# Altium PCB PCB1.PcbDoc
Units mm, origin at the board's own origin, x right, y up, seen from the top; angles counter-clockwise.
Board outline 113.41 x 33.78 mm, 2 copper layers (Top Layer, Bottom Layer); 48 components, 34 nets, 178 pads, 58 vias.
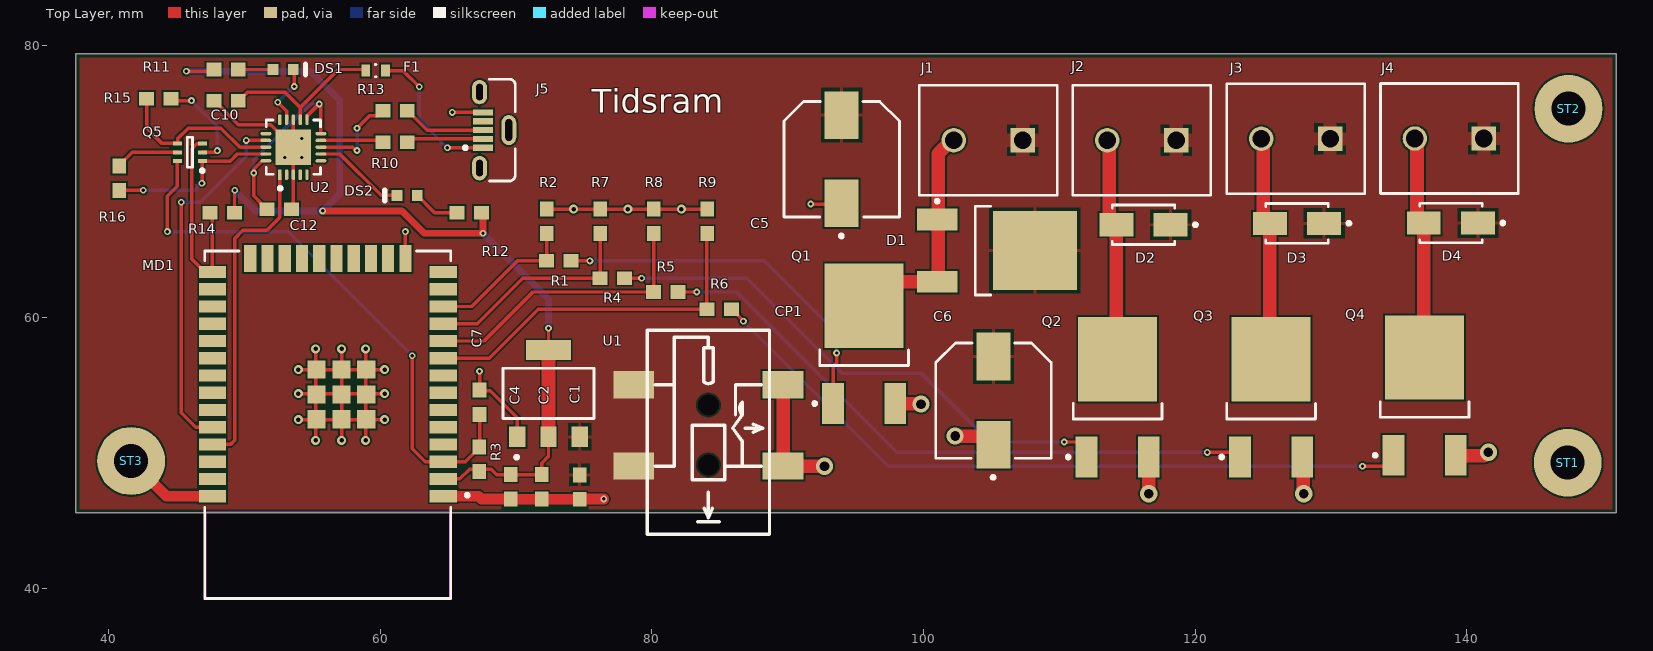
[diagram p0: Top Layer view]
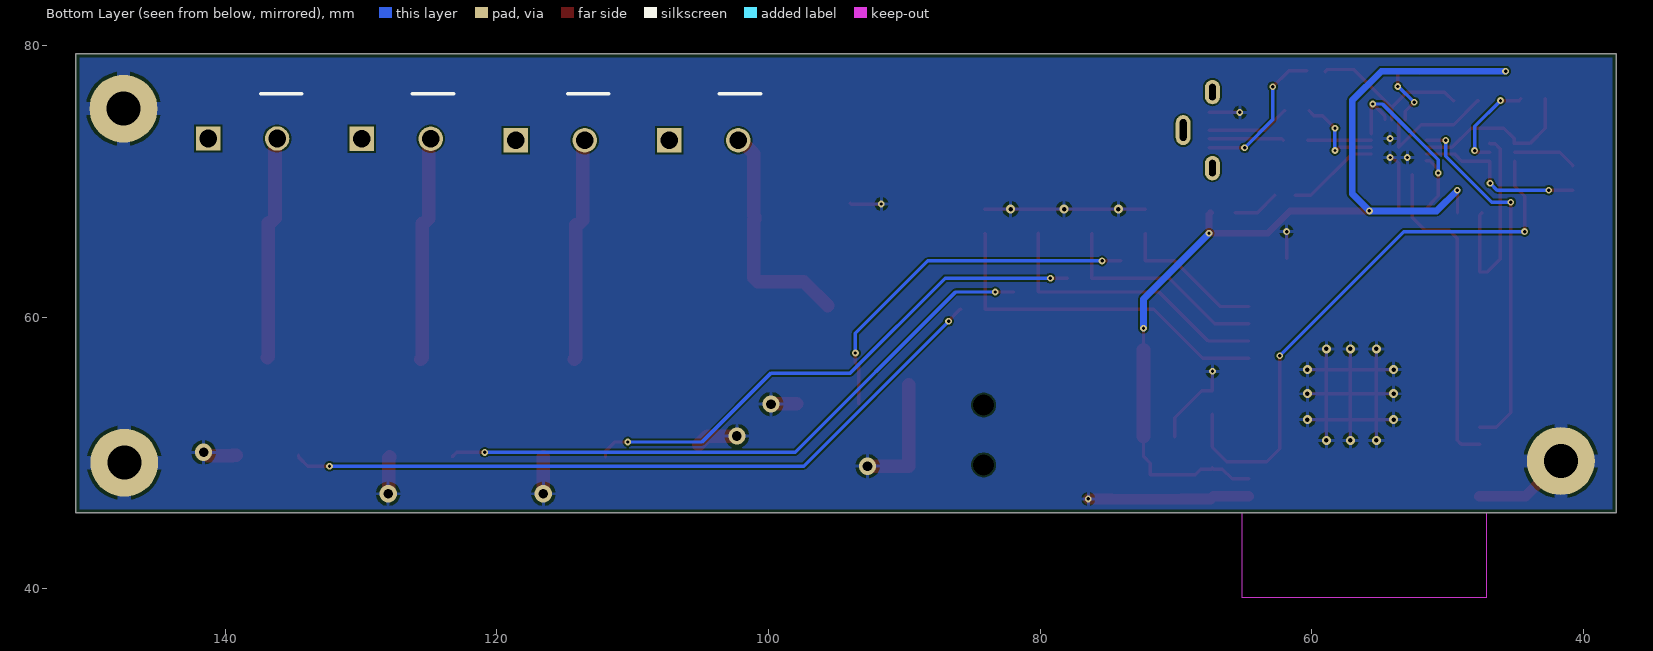
[diagram p1: Bottom Layer view, seen from below]
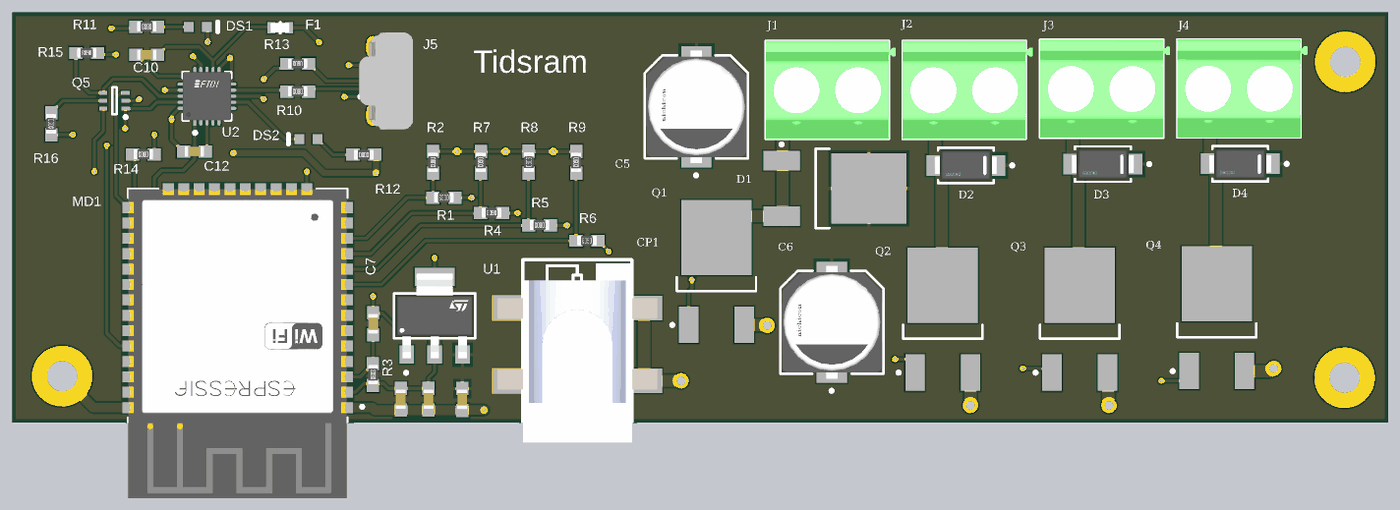
[diagram p2: 3D render of the assembled board from above, using the file's embedded part models]

## Layer stack, top to bottom
Top Solder: solder mask 0.0254, SM-003, Dk 4
Top Layer: signal copper 0.0356
Dielectric 1: dielectric 0.32, FR-4, Dk 4.8
Bottom Layer: signal copper 0.0356
Bottom Solder: solder mask 0.0254, SM-003, Dk 4

## Board outline
37.592,79.375 151.003,79.375 151.003,45.593 37.592,45.593

## Design rules (kind name [scope] priority, off if disabled: settings)
BoardOutlineClearance [All] p1: gap=0.254 ignorepadtopadclearanceinfootprint=FALSE except(0: Arc-SplitContinuation Track-SplitContinuation SMDPad-SplitContinuation THPad-SplitContinuation Via-SplitContinuation Fill-SplitContinuation Poly-SplitContinuation Region-SplitContinuation Text-SplitContinuation)
Clearance Clearance_2 [InNet('GND')] p1: gap=0.127 ignorepadtopadclearanceinfootprint=FALSE
Clearance [All] p2: gap=0.127 ignorepadtopadclearanceinfootprint=FALSE
Length [All] p1: maxlimit=2540 minlimit=0
MatchedLengths [InDifferentialPair('D')] p1: tolerance=25.4 checknetsindiffpair=FALSE checkdiffpairvsdiffpair=TRUE checkxsignals=TRUE checkothers=TRUE
MinimumSolderMaskSliver [All] p1: minsoldermaskwidth=0.2
PolygonConnect [All] p1: connectstyle=Relief reliefconductorwidth=0.254 reliefentries=4 polygonreliefangle="90 Angle" airgapwidth=0.254
RoutingVias [All] p1: holewidth=0.25 width=0.5 viastyle="Through Hole" minholewidth=0.25 minwidth=0.5 maxholewidth=0.711 maxwidth=1.27
SolderMaskExpansion [All] p1: expansion=0.05 istentingtop=FALSE
Width GND [InNet('GND')] p1: maxlimit=1.5 minlimit=0.254 preferedwidth=1 minimp=50.000000 maximp=50.000000 favimp=50.000000
Width POWER [InNetClass('POWER')] p2: maxlimit=1.5 minlimit=1 preferedwidth=1 minimp=50.000000 maximp=50.000000 favimp=50.000000
Width [All] p3: maxlimit=1 minlimit=0.254 preferedwidth=0.5 minimp=50.000000 maximp=50.000000 favimp=50.000000
29 further rules are at their usual default settings.

## Components (designator, comment, footprint, x,y, rotation, side; value= is the part's Value field where it differs from the comment)
C1 "Cap SMD" "C0603 (1608)" 74.676,47.487 r90 top value=100nF
C2 "Cap SMD" "C0603 (1608)" 71.882,47.498 r90 top value=10uF
C4 "Cap SMD" "C0603 (1608)" 69.596,47.498 r90 top value=100nF
C5 "UUX2A220MNL6GS" FP-UUX2A220MNL6GS-MFG 93.98,71.628 r90 top
C6 "UUX2A220MNL6GS" FP-UUX2A220MNL6GS-MFG 105.156,53.848 r90 top
C7 "Cap SMD" "C0603 (1608)" 67.31,53.732 r270 top value=10nF
C10 "100nF" "C0603 (1608)" 48.641,75.928 r0 top
C12 "100nF" "C0603 (1608)" 52.567,67.945 r180 top
CP1 "Power jack" "CLIFF SMD KLD-0202 BARRELL JACK DC CONNECTOR 2.1mm" 84.162,44.022 r180 top
D1 "MURD620CTG" ONSC-DPAK-3-369C-01_V 105.41,64.897 r0 top
D2 "ES2BA-13-F" FP-SMA-MFG 116.205,66.802 r180 top value=25pF
D3 "ES2BA-13-F" FP-SMA-MFG 127.507,66.907 r180 top value=25pF
D4 "ES2BA-13-F" FP-SMA-MFG 138.843,66.929 r180 top value=25pF
DS1 "HSMG-C190" AVAG-HSMX-C190_V 52.844,78.232 r0 top
DS2 "HSMG-C190" AVAG-HSMX-C190_V 61.976,68.961 r180 top
F1 "SF-0603S050-2" FP-SF-0603S-MFG 59.653,78.158 r180 top value=232mΩ
J1 "1729128" PHOE-1729128-2_V 104.775,73.025 r180 top
J2 "1729128" PHOE-1729128-2_V 116.078,73.025 r180 top
J3 "1729128" PHOE-1729128-2_V 127.412,73.13 r180 top
J4 "1729128" PHOE-1729128-2_V 138.734,73.152 r180 top
J5 "105133-0001" MOLX-105133-0001_V 68.389,73.772 r90 top
MD1 "ESP32-WROOM-32D" FP-ESP32-WROOM-32D-MFG 56.134,52.07 r180 top
Q1 "NTD4969NT4G" ONSC-DPAK-3-369AA-01_V 95.631,58.033 r90 top
Q2 "NTD4969NT4G" ONSC-DPAK-3-369AA-01_V 114.3,54.096 r90 top
Q3 "NTD4969NT4G" ONSC-DPAK-3-369AA-01_V 125.603,54.096 r90 top
Q4 "NTD4969NT4G" ONSC-DPAK-3-369AA-01_V 136.906,54.223 r90 top
Q5 "MBT2222ADW1T1G" ONSC-SOT-363-6-419B-02_V 45.974,72.136 r180 top
R1 "Res" "R0603 (1608)" 73.152,64.135 r180 top
R2 "Res" "R0603 (1608)" 72.263,67.056 r270 top
R3 "Res" "R0603 (1608)" 67.292,49.528 r90 top
R4 "Res" "R0603 (1608)" 77.089,62.865 r180 top
R5 "Res" "R0603 (1608)" 81.037,61.849 r180 top
R6 "Res" "R0603 (1608)" 84.952,60.579 r180 top
R7 "Res" "R0603 (1608)" 76.2,67.056 r270 top
R8 "Res" "R0603 (1608)" 80.137,67.067 r90 top
R9 "Res" "R0603 (1608)" 84.074,67.056 r270 top
R10 "27" "R0603 (1608)" 61.087,72.88 r180 top
R11 "Res" "R0603 (1608)" 48.641,78.232 r180 top
R12 "Res" "R0603 (1608)" 66.548,67.691 r0 top
R13 "27" "R0603 (1608)" 61.087,75.184 r180 top
R14 "Res" "R0603 (1608)" 48.363,67.691 r180 top
R15 "Res" "R0603 (1608)" 43.699,76.073 r180 top
R16 "Res" "R0603 (1608)" 40.767,70.231 r270 top
ST1 "PTH-M2D5X5" PTH-M2D5X5 147.447,49.276 r0 top
ST2 "PTH-M2D5X5" PTH-M2D5X5 147.507,75.346 r0 top
ST3 "PTH-M2D5X5" PTH-M2D5X5 41.656,49.403 r0 top
U1 "LD1117S33CTR" FP-SOT-223-0046067_14-MFG 72.39,54.381 r90 top
U2 "FT231XQ-R" FP-QFN-20-MFG 53.602,72.51 r90 top

## Footprints (in the part's own frame and the unit in brackets; to place one, negate y for a bottom-side part, rotate by r counter-clockwise, add the part's x,y. Pads: shape width x height; smd on the part's side, far side on the other; paste and mask are expansions set on the pad)
AVAG-HSMX-C190_V [mm] "SMD, 2-Leads, Body 1.6x0.8mm, Height 0.9mm"
  rect 0.8x0.8 smd: 1(-0.75,0) 2(0.75,0)
  silkscreen extent 1.65,-0.4 1.65,0.4, body extent -0.8,-0.4 0.8,0.4, height 0.9
"C0603 (1608)" [mm] "Chip Capacitor, 2-Leads, Body 1,60x0,81mm, IPC Low Density"
  rect 1.1x1 smd: 1(-0.9,0) 2(0.9,0)
  body extent -0.8,-0.41 0.8,0.42, height 0.79
"CLIFF SMD KLD-0202 BARRELL JACK DC CONNECTOR 2.1mm" [mm] "DC power jack, Cliff SMD 2.1mm and 2.5mm"
  round 0 hole 1.55 unplated: 0(0,-5.1)
  round 0 hole 1.55: 0(0,-9.5)
  rect 3x2 smd: 1(5.5,-5) 1(5.5,-11) 2(-5.5,-5) 3(-5.5,-11)
  silkscreen extent -4.5,-15 4.5,0, body extent -6.6,-14.67 6.6,0.13, height 11
FP-ESP32-WROOM-32D-MFG [mm]
  rect 2x0.9 smd paste+0 mask+0: 1(-8.5,5.26) 2(-8.5,3.99) 3(-8.5,2.72) 4(-8.5,1.45) 5(-8.5,0.18) 6(-8.5,-1.09) 7(-8.5,-2.36) 8(-8.5,-3.63) 9(-8.5,-4.9) 10(-8.5,-6.17) 11(-8.5,-7.44) 12(-8.5,-8.71) 13(-8.5,-9.98) 14(-8.5,-11.25) 25(8.5,-11.25) 26(8.5,-9.98) 27(8.5,-8.71) 28(8.5,-7.44) 29(8.5,-6.17) 30(8.5,-4.9) 31(8.5,-3.63) 32(8.5,-2.36) 33(8.5,-1.09) 34(8.5,0.18) 35(8.5,1.45) 36(8.5,2.72) 37(8.5,3.99) 38(8.5,5.26)
  rect 0.9x2 smd paste+0 mask+0: 15(-5.715,-12.25) 16(-4.445,-12.25) 17(-3.175,-12.25) 18(-1.905,-12.25) 19(-0.635,-12.25) 20(0.635,-12.25) 21(1.905,-12.25) 22(3.175,-12.25) 23(4.445,-12.25) 24(5.715,-12.25)
  rect 1.33x1.33 smd paste+0 mask+0: 39(-2.835,-0.405) 39(-2.835,-4.075) 39(-2.835,-2.24) 39(-1,-0.405) 39(-1,-2.24) 39(-1,-4.075) 39(0.835,-0.405) 39(0.835,-2.24) 39(0.835,-4.075)
  Keep-Out Layer region: -9,6.45 9,6.45 9,12.75 -9,12.75
  Keep-Out Layer region: -9,6.45 9,6.45 9,12.75 -9,12.75
  silkscreen extent -10.4,-12.8 9.05,12.8, body extent -9.6,-13.35 9.6,12.9, height 0.25
FP-QFN-20-MFG [mm]
  rect 0.8x0.25 smd paste+0 mask+0: 1(-2.025,1)
  rrect100% 0.8x0.25 smd paste+0 mask+0: 2(-2.025,0.5) 3(-2.025,0) 4(-2.025,-0.5) 5(-2.025,-1) 11(2.025,-1) 12(2.025,-0.5) 13(2.025,0) 14(2.025,0.5) 15(2.025,1)
  rrect100% 0.25x0.8 smd paste+0 mask+0: 6(-1,-2.025) 7(-0.5,-2.025) 8(0,-2.025) 9(0.5,-2.025) 10(1,-2.025) 16(1,2.025) 17(0.5,2.025) 18(0,2.025) 19(-0.5,2.025) 20(-1,2.025)
  rect 2.6x2.6 smd paste+0 mask+0: 21(0,0)
  silkscreen extent -3.15,-2 2,2, body extent -2.52,-2.52 2.52,2.52, height 0.25
FP-SF-0603S-MFG [mm]
  rect 0.65x0.9 smd paste+0 mask+0: 1(-0.725,0) 2(0.725,0)
  silkscreen extent -0.03,-0.45 0.03,0.45, body extent -1.15,-0.55 1.15,0.55, height 0.25
FP-SMA-MFG [mm]
  rect 2.5x1.7 smd paste+0 mask+0: 1(-2,0) 2(2,0)
  silkscreen extent -3.95,-1.46 2.3,1.46, body extent -3.35,-1.56 3.35,1.56, height 0.25
FP-SOT-223-0046067_14-MFG [mm]
  rect 1.5x1.2 smd paste+0 mask+0: 1(-3.2,2.3) 2(-3.2,0) 3(-3.2,-2.3)
  rect 1.5x3.3 smd paste+0 mask+0: 4(3.2,0)
  silkscreen extent -4.82,-3.35 1.85,3.35, body extent -4.05,-3.45 4.05,3.45, height 0.25
FP-UUX2A220MNL6GS-MFG [mm] "Polarized Capacitor (Radial); 2 Leads"
  rect 3.5x2.5 smd paste+0 mask+0: 1(-3.25,0) 2(3.25,0)
  silkscreen extent -5.77,-4.25 4.25,4.25, body extent -5.25,-4.5 5.25,4.5, height 0.25
MOLX-105133-0001_V [mm] "Micro USB B, 5-Leads, Pitch 0.65mm"
  rect 0.45x1.5 smd mask+0.1: 1(-1.3,0.825) 2(-0.65,0.825) 3(0,0.825) 4(0.65,0.825) 5(1.3,0.825)
  oval 1.8x1.1 hole 0.5 slot 1.2 at 0 deg: 6(-2.8,1.075) 7(2.8,1.075)
  oval 2.2x1.1 hole 0.5 slot 1.6 at 0 deg: 8(0,-1.075)
  silkscreen extent -3.75,-1.56 3.75,2.25, body extent -4.02,-2.22 4,2.23, height 7.51
ONSC-DPAK-3-369AA-01_V [mm] "DPAK, 3-Leads, Body 6.54x6.095mm, Pitch 2.29mm"
  rect 3x1.6 smd: 1(-4.4,2.29) 3(-4.4,-2.29)
  rect 6.2x5.8 smd: 4(2.8,0)
  silkscreen extent -4.52,-3.27 -0.45,3.76, body extent -1.6,-3.27 4.49,3.27, height 2.47
ONSC-DPAK-3-369C-01_V [mm] "DPAK, 3-Leads, Body 6.54x6.095mm, Pitch 2.29mm"
  rect 3x1.6 smd: 1(-4.4,2.29) 3(-4.4,-2.29)
  rect 6.2x5.8 smd: 4(2.8,0)
  silkscreen extent -4.52,-3.27 -0.45,3.76, body extent -1.6,-3.27 4.49,3.27, height 2.38
ONSC-SOT-363-6-419B-02_V [mm] "SOT23, 6-Leads, Body 2x1.25mm, Pitch 0.65mm"
  rect 0.66x0.3 smd: 1(-0.92,0.65) 2(-0.92,0) 3(-0.92,-0.65) 4(0.92,-0.65) 5(0.92,0) 6(0.92,0.65)
  silkscreen extent -1.05,-1.1 0.19,1.47, body extent -0.63,-1 0.63,1, height 1.1
PHOE-1729128-2_V [mm] "Receptacle, 2-Leads, Body 8.1x10.16mm, Pitch 5.08mm"
  rect 1.8x1.8 hole 1.3: 1(-2.54,0)
  round 1.8 hole 1.3: 2(2.54,0)
  silkscreen extent -5.08,-4.05 5.08,4.05, body extent -5.65,-4.05 5.08,4.05, height 10.01
PTH-M2D5X5 [mm]
  round 5 hole 2.5: 1(0,0)
"R0603 (1608)" [mm]
  rect 1.1x1 smd: 1(-0.9,0) 2(0.9,0)
  body extent -0.8,-0.42 0.8,0.38, height 0.45

## Part data
C5 C6: library part CMP-12462-000025-1, "CAP ALUM 22UF 20% 100V SMD", Capacitance=22uF, Case/Package=Radial, Leakage Current=105uA, Max Operating Temperature=105°C, Min Operating Temperature=-55°C, Package Quantity=1, Ripple Current=121mA, Tolerance=20%, Voltage Rating=100V, Diameter=8mm, Dissipation Factor=0.08%, Features="General Purpose", Height=10mm, Height - Seated (Max)=0.413inch, Lead Free="Lead Free", Lead Pitch=3.1mm, Length=10mm, Life (Hours)=2000Hour, Mount="Surface Mount", Packaging="Tape and Reel", Radiation Hardening=No, Termination=SMD/SMT, Voltage Rating (DC)=100V
C10 C12: library part Cap, "Capacitor", LatestRevisionDate=17-Jul-2002, LatestRevisionNote="Re-released for DXP Platform.", PackageDescription="Radial Cap, Thru-Hole; 2 Leads; 0.3 in Pin Spacing", PackageReference=RAD-0.3, Published=8-Jun-2000, Publisher="Altium Limited"
CP1: library part "Barrel jack KLD-0202", "Surface mounted DC barrell jack, KLD-0202 design"
D1: library part CMP-0902-00255-1, "SWITCHMODE(TM) Power Rectifier, 3-Pin DPAK, Pb-Free, Tube", Manufacturer="On Semiconductor", ComponentLink1Description="Manufacturer URL", ComponentLink1URL=http://www.onsemi.com/, ComponentLink2Description=Datasheet, ComponentLink2URL=http://www.onsemi.cn/pub_link/Collateral/MURD620CT-D.PDF, ComponentLink3Description="Package Specification", ComponentLink3URL=http://www.onsemi.cn/pub_link/Collateral/369C.PDF, DatasheetVersion="Rev. 11", IFSM Max (A)=50, Mounting Technology="Surface Mount", PackageDescription="3-Pin Flange Mount, Body 6.54 x 6.095 mm, Pitch 2.29 mm", PackageReference=DPAK-3-369C-01, PackageVersion="Rev. E, 02/2014", Packing=Tube, PartNumber=MURD620CTG, RoHS=TRUE, Type=Ultrafast, VRRM Max (V)=200
D2 D3 D4: library part CMP-12791-000037-1, "DIODE GEN PURP 100V 2A SMA", Capacitance=25pF, Forward Current=2A, Manufacturer="Diodes Inc.", Max Junction Temp=+150°C, Max Repetitive Reverse Voltage=100V, Max Surge Forward Current=50A, Package=SMA, Peak Reverse Current=5uA, Temperature="-55°C to +150°C", Temperature Range Low=-55°C, Automotive=No, Category=Diode, ComponentLink2Description=Datasheet, ComponentLink2URL=https://www.diodes.com/assets/Datasheets/ds14002.pdf, Device Class L1="Discrete Semiconductors", Device Class L2=Diodes, Device Class L3="Rectifier Diodes", Digikey Description="DIODE GEN PURP 100V 2A SMA", Footprint Url=https://www.diodes.com/assets/Package-Files/SMA.pdf, Height=2.4mm, Lead Free=Yes, Manufacturer Part Number=ES2BA-13-F, Mouser Description="ES2BA Series 100 V 2 A Surface Mount Super-Fast Rectifier - DO-214AC", Octopart=https://octopart.com/es2ba-13-f-diodes+inc.-14402013, Reverse Voltage=100V, RoHS=TRUE, Standoff Height=0.05mm, Temperature Range High=+150°C
DS1 DS2: library part CMP-1744-00002-1, "Chip LED, Green, 2.2 V, -40 to 85 degC, 2-Pin SMD, RoHS, Tape and Reel", Case\Package=SOIC, Clock Frequency="100 KHz", Frequency="400 KHz", Max Operating Temperature="85 degC", Max Supply Voltage="5.5 V", Min Operating Temperature="-40 degC", Min Supply Voltage="1.7 V", Nominal Supply Current="2 mA", Package Quantity=3000, Access Time="3500 ns", ComponentLink1Description="Manufacturer URL", ComponentLink1URL=http://www.avagotech.com/, ComponentLink2Description=Datasheet, ComponentLink2URL=http://docs.avagotech.com/docs/AV02-0551EN, ComponentLink3Description="Package Specification", ComponentLink3URL=http://www.fairchildsemi.com/dwg/MA/MA03D.pdf, DatasheetVersion=Mar-12, Density="32 kb", Height="1.5 mm", Interface=Serial, Length="5 mm", Max Clock Frequency="100 KHz", Mount="Surface Mount", PackageDescription="2-Pin Surface Mount Device, Body 1.6 x 0.8 mm, Height 0.9 mm", PackageReference=HSMX-C190, Packaging="Tape and Reel", Pins=8, Radiation Hardening=No, REACH SVHC="No SVHC", RoHSCompliant=true, Width="4 mm"
F1: library part CMP-07399-000004-1, "FUSE BOARD MNT 500MA 50VDC 0603", Fuse Current=0.5A, Fuse Interrupt Ac Current=50A, Manufacturer="Bourns Inc.", Max Fuse Ac Voltage=35V, Max Fuse Dc Voltage=50V, Package=SF-0603S, Resistance=232mΩ, Temperature="-20°C to +105°C", Temperature Range High=+105°C, Temperature Range Low=-20°C, Automotive=No, Category=Fuse, ComponentLink2Description=Datasheet, ComponentLink2URL=https://www.bourns.com/docs/product-datasheets/sf0603s.pdf, Device Class L1="Circuit Protection", Device Class L2=Fuses, Device Class L3=unset, Digikey Description="FUSE BOARD MNT 500MA 50VDC 0603", Fuse Blow Speed=Slow, Fuse I2T=0.009A2Sec, Fuse Interrupt Dc Current=50A, Height=0.55mm, Ipc Land Pattern Name=CAPC16080X45, Lead Free=Yes, Manufacturer Part Number=SF-0603S050-2, Mouser Description="Surface Mount Fuses 0.50A Slow Blow SinglFuse", Octopart=https://octopart.com/sf-0603s050-2-bourns-10486821, RoHS=TRUE
J1 J2 J3 J4: library part CMP-2000-05815-1, "PCB Terminal Block, 13.5 A, 400 V, 2-Pin THD, RoHS, Bulk", Current Rating=13500mA, Manufacturer="Phoenix Contact", Package Description="2-Pin Through Hole Device, Body 8.1 x 10.16 mm, Pitch 5.08 mm", Package Reference=1729128-2, Package Version=03/2015, Voltage Rating=400V, Datasheet URL=https://datasheet.ciiva.com/16046/1729128-16046181.pdf, Datasheet Version=12/2013, Manufacturer URL=http://www.phoenixcontact.com/, Mounting Technology=ThroughHole, No. of Positions=2, No. of Rows=1, Orientation=Horizontal, Package URL=https://www.phoenixcontact.com/online/portal/pi/pxc/product_detail_page/!ut/p/b1/3VdJjqNKFDxLH8AFycySyWY2ozFsEPOMMQaDOX1XedGL_1Vdm5YXJleknhSKeBkvI6EA8ncAo3AYoDhBQGco6KN7VURTdemj9us_IEKEZo_YHiPAEWEFmDGOHMORkqKYCORBZxgL7ZoaZYcbFFUZ3fqxSY6GOuxydWUuHqz1ynmMFygu583Bob0Ewr6Sd_l-5m-kAueHiB0jpRwZwe58wwtkpxtMYd_LmGcDRU02dRNEyWt6Y2ti5pSyJ_reIkzIulrqApdnbT11V5jnCKbYNCvhEM1MCpPByat_X379-iThf08CI5GfOPqfBeS3BRoBOdD55AKVv0iLwCMq-2BrzXWSGRH7pUGD9uwXQjiph3xL0DKQwdGa0JImiIOmBNOestqgwTHSSs2oOep-78apyXQBvNi8ZLaFjvjWvcaUEBu0MC6Wbe-d6mB0FAebo2lUWinqYaZs5DAYzV0RP9yitUjnGJ0iI9xhZkT42OCQNUJJhkgWINNQLP2JFP6OpMg3JCVg70jqHT0lvKOnhHf0lPuOnnLf0VPuWx6_dxwUIvwk5WMkT0kLL1mh61l2yZVSzG3pYV_bqo-mj6uMKwKwdnnW8Jh5RTOJzMOA5c-eJDaZQw4mTMPH02PvS_ZAqNVjVTo2WyYLkwH_KU1mmmG5kjRhDqPXLwwVHvVOjCM60-fpXvTDfMGW1PVFVS1r4e4yVDk4ZdNbkUHvqPqQSeian4UD39fNKmachqdJ1NJbyk8rXT9mXTvPk3oE5meulKGgiruPJek-4I9hTT6G8ZLOyRSm2RRVbThERQad5OS28hdt4YW4vG0stgYYzsWsK4_7y6DZMjJSCqri1kyiZR5vD7pwIrNR7QwPHTcLTI5qT7eRlpHrdGiupYlqQDJ7zy_CND8fWWBoLRXxk1RVcXiBQwbTD4Xi7KL-FuO94t9xaqweXzH, Packing=Bulk, PartNumber=1729128, Pitch=5.08mm, RoHS=TRUE
J5: library part CMP-2000-05829-1, "Micro-USB B Receptacle, Vertical, -30 to 85 degC, 5-Pin SMD, RoHS, Tape and Reel", Color=Black, Current Rating=1.8A, Flammability Rating=UL94V-0, Manufacturer=Molex, Package Description="5-Pin Surface Mount Device, Pitch 0.65 mm", Package Version="Rev. C, 11/2015", Voltage - Max=30V, Voltage Rating=30VAC, Brand=Molex, Connector Type=MicroUSBTypeBReceptacle, Contact Material=CopperAlloy, Contact Plating=Gold, Datasheet URL=http://www.molex.com/webdocs/datasheets/pdf/en-us/1051330001_IO_CONNECTORS.pdf, Datasheet Version=03/2016, Factory Pack Quantity=6000, Gender=Receptacle, Manufacturer URL=http://www.molex.com/, Mounting Angle=Vertical, Mounting Style=SMD/SMT, Mounting Technology=SurfaceMount, Number of Ports=1, Package Reference=105133-0001, Package URL=http://www.molex.com/pdm_docs/sd/1051330001_sd.pdf, Packaging=Reel, PartNumber=105133-0001, Product=MicroUSBTypeBConnectors, Product Category=USBConnectors, RoHS=Details, Series=105133, Standard=USB, Termination Style=SolderTail
MD1: library part CMP-194065-000003-1, "WIFI MODULE 32MBITS SPI FLASH", Manufacturer="Espressif Systems", Max Frequency=2484MHz, Max Supply Voltage=3.6V, Min Supply Voltage=3V, Nominal Supply Current=500mA, Temperature="-40°C to +85°C", Temperature Range High=+85°C, Temperature Range Low=-40°C, Automotive=No, Bandwidth=72MHz, Category=UNK, ComponentLink2Description=Datasheet, ComponentLink2URL=https://www.espressif.com/sites/default/files/documentation/esp32-wroom-32d_esp32-wroom-32u_datasheet_en.pdf, Data Rate=150Mbits/s, Device Class L1="Integrated Circuits (ICs)", Device Class L2="RF Semiconductors and Devices", Device Class L3=Transceivers, Digikey Description="WIFI MODULE 32MBITS SPI FLASH", Height=3.2mm, Interface=I2C,SPI,UART,Ethernet,I2S,Other, Lead Free=Yes, Manufacturer Part Number=ESP32-WROOM-32D, Mouser Description="Wi-Fi/BT BLE Module ESP32-D0WD, SPI Flash, UART, P", Number Of Adc Channels=16, Number Of Gpio=32, Octopart=https://octopart.com/esp32-wroom-32d-espressif+systems-91040050, Package=ESP32-WROOM-32D, RoHS=TRUE, Sensitivity=-98dBm
Q1 Q2 Q3 Q4: library part CMP-1058-00344-1, "Power MOSFET, 30 V, 41 A, Single N-Channel, 3-Pin DPAK, Pb-Free, Tape and Reel", Manufacturer="On Semiconductor", Package Type="DPAK-3, IPAK-3", Channel Polarity="N Channel", Ciss Typ (pF)=837, ComponentLink1Description="Manufacturer URL", ComponentLink1URL=http://www.onsemi.com/, ComponentLink2Description=Datasheet, ComponentLink2URL=http://www.onsemi.cn/pub_link/Collateral/NTD4969N-D.PDF, ComponentLink3Description="Package Specification", ComponentLink3URL=http://www.onsemi.cn/pub_link/Collateral/369AA.PDF, Configuration=Single, Coss Typ (pF)=347, Crss Typ (pF)=180, DatasheetVersion="Rev. 1", ID Max (A)=41, Mounting Technology="Surface Mount", PackageDescription="3-Pin Flange Mount, Body 6.54 x 6.095 mm, Pitch 2.29 mm", PackageReference=DPAK-3-369AA-01, PackageVersion="Rev. B, 06/2010", Packing="Tape and Reel", PartNumber=NTD4969NT4G, Qrr Typ (nC)=8, RoHS=Pb-Free, V(BR)DSS Min (V)=30, VGS Max (V)=20, VGS(th) Max (V)=2.5
Q5: library part CMP-1048-00839-1, "General Purpose Transistor, NPN Silicon, 6-Pin SOT-363, Pb-Free, Tape and Reel", Manufacturer="On Semiconductor", ComponentLink1Description="Manufacturer URL", ComponentLink1URL=http://www.onsemi.com/, ComponentLink2Description=Datasheet, ComponentLink2URL=http://www.onsemi.com/pub_link/Collateral/MBT2222ADW1T1-D.PDF, ComponentLink3Description="Package Specification", ComponentLink3URL=http://www.onsemi.cn/pub_link/Collateral/419B-02.PDF, DatasheetVersion="Rev. 5", fT Min (MHz)=300, IC Continuous (A)=0.6, Mounting Technology="Surface Mount", PackageDescription="6-Pin Small Outline Transistor, Body 2 x 1.25 mm, Pitch 0.65 mm", PackageReference=SOT-363-6-419B-02, PackageVersion="Rev. Y, 12/2012", Packing="Tape and Reel", PartNumber=MBT2222ADW1T1G, Polarity="Dual NPN", RoHS=TRUE
R1 R2 R3 R4 R5 R6 R7 R8 R9 R11 R12 R14 R15 R16: library part "Resistor EU"
R10 R13: library part Res2, "Resistor", LatestRevisionDate=17-Jul-2002, LatestRevisionNote="Re-released for DXP Platform.", PackageDescription="Axial Device, Thru-Hole; 2 Leads; 0.4 in Pin Spacing", PackageReference=AXIAL-0.4, Published=8-Jun-2000, Publisher="Altium Limited"
ST1 ST2 ST3: library part CMP-00028-00004-1, "M2 PTH (2.5mm), 5mm pad", Pins=1
U1: library part CMP-0244-00307-2, "IC REG LINEAR 3.3V 800MA SOT223", Case/Package=SOT-223, Dropout Voltage=1.1V, Input Bias Current=5mA, Max Input Voltage=15V, Max Operating Temperature=125°C, Max Output Current=1.3A, Max Output Voltage=3.3V, Max Power Dissipation=12W, Min Input Voltage=5.3V, Min Operating Temperature=-40°C, Output Current=950mA, Output Voltage Accuracy=1%, Package Quantity=1, Quiescent Current=10mA, Accuracy=1%, Contact Plating=Tin, Height=1.8mm, Lead Free="Lead Free", Length=6.5mm, Max Supply Voltage=15V, Min Output Voltage=3.3V, Min Supply Voltage=3.3V, Mount="Surface Mount", Nominal Output Voltage=3.3V, Number Of Outputs=1, Number of Pins=4, Number of Regulators=1, Number of Terminals=4, Output Type=Fixed, Output Voltage=3.3V, Packaging="Tape and Reel", Polarity=Positive, Power Dissipation=12W, Radiation Hardening=No, REACH SVHC="No SVHC", Termination=SMD/SMT, Weight=0.01lb, Width=3.5mm
U2: library part CMP-0248-00001-3, "IC USB SERIAL FULL UART 20QFN", Case/Package=QFN, Max Operating Temperature=85°C, Max Supply Voltage=5.5V, Min Operating Temperature=-40°C, Min Supply Voltage=2.97V, Operating Supply Current=8mA, Package Quantity=5000, Data Rate=12Mbps, Interface=UART, Lead Free="Lead Free", Mount="Surface Mount", Number Of Channels=1, Number of Pins=20, Packaging="Tape and Reel", Weight=0.004339oz

## Via types
v1: diameter 0.5, hole 0.25, Top Layer to Bottom Layer, 37 vias
v2: diameter 0.66, hole 0.33, Top Layer to Bottom Layer, 15 vias
v3: diameter 1.27, hole 0.711, Top Layer to Bottom Layer, 6 vias

## Nets (pads, with @x,y where several pads share a name; then routed paths per layer and width w, separated by ;. In a path a pad name is that pad's centre, name@x,y a point inside that pad or via, vN(x,y) a via of type N, cw(c..) or ccw(c..) an arc to the next point about the centre after c; other vN are vias at no path point)
+3v3: C2.2 C4.2 MD1.2 R3.1 R11.2 R12.2 R14.1 U1.2 U1.4 | length 73.6
  Top Layer w0.254: v1(45.72,78.105) 47.614,78.105 R11.2 ; R14.1 49.263,69.329 v1(49.276,69.342) ; MD1.2 64.64,48.086 65.866,48.086 66.578,48.798 67.224,48.798 R3.1@67.321,48.895 ; R3.1@67.31,48.884 67.31,48.834 67.346,48.798 68.169,48.798 68.569,48.398 C4.2 C2.2 71.882,49.249 72.39,49.757 U1.2 ; U1.4 v1(72.39,59.182)
  Top Layer w0.5: v1(55.753,67.818) 61.595,67.818 63.246,66.167 v1(67.564,66.167) 67.564,67.575 R12.2
  Top Layer w1: U1.2 U1.4
  Bottom Layer w0.5: v1(45.72,78.105) 54.864,78.105 57.023,75.946 57.023,69.088 v1(55.753,67.818) 50.8,67.818 v1(49.276,69.342) ; v1(67.564,66.167) 72.39,61.341 v1(72.39,59.182)
+12: C1.2 C5.2 C6.2 CP1.1 D1.4 D2.1 D3.1 D4.1 J1.1 J2.1 J3.1 J4.1 U1.3
"Boot opt": MD1.25 Q5.3 R14.2 | length 15.4
  Top Layer w0.254: Q5.3 46.871,72.763 46.496,72.763 46.101,72.368 46.101,64.303 47.084,63.32 MD1.25 47.634,67.52 R14.2
DTR: Q5.4 R15.2 U2.18 | length 12.7
  Top Layer w0.254: R15.2 42.799,73.914 43.927,72.786 Q5.4 45.078,72.786 45.101,72.809 45.101,73.168 45.847,73.914 48.26,73.914 49.668,72.506 50.547,72.506 50.551,72.51 U2.18
EN: C7.2 MD1.3 Q5.6 R3.2 | length 42.4
  Top Layer w0.254: v1(44.323,66.294) 44.323,68.894 45.054,69.625 Q5.6 ; v1(62.357,57.15) 62.357,50.292 63.299,49.35 66.264,49.35 67.292,50.378 R3.2 67.31,50.446 C7.2
  Bottom Layer w0.254: v1(44.323,66.294) 53.213,66.294 v1(62.357,57.15)
GND: C1.1 C2.1 C4.1 C5.1 C6.1 C7.1 C10.1 C12.1 CP1.2 CP1.3 J5.5 MD1.1 MD1.15 MD1.38 MD1.39 Q1.3 Q2.3 Q3.3 Q4.3 R2.1 R7.1 R8.2 R9.1 ST1.1 ST2.1 ST3.1 U1.1 U2.3 U2.13 U2.21 | length 118.6
  Top Layer w0.254: C10.1 47.791,75.928 49.551,74.168 51.944,74.168 U2.21 U2.13 ; C12.1 53.602,68.08 U2.3 53.602,71.337 54.02,71.755 v1(54.229,71.755) ; v2(53.975,52.451) MD1.39@55.245,52.451 ; v2(53.975,54.356) MD1.39@55.245,54.356 ; v2(53.975,56.134) MD1.39@55.245,56.134 ; v2(55.245,50.927) MD1.39@55.245,52.451 ; v2(55.245,57.658) MD1.39@55.245,56.134 ; v2(57.15,50.927) MD1.39@57.15,52.451 ; v2(57.15,57.658) MD1.39@57.15,56.134 ; v2(58.928,50.927) MD1.39@58.928,52.451 ; v2(58.928,57.658) MD1.39@58.928,56.134 ; v2(60.325,52.451) MD1.39@58.928,52.451 ; v2(60.325,54.356) MD1.39@58.928,54.356 ; v2(60.325,56.134) MD1.39@58.928,56.134 ; MD1.15 v1(61.849,66.294) ; v1(65.293,75.072) J5.5 ; v1(67.31,56.007) 67.31,54.582 68.1,54.582 70.09,52.592 U1.1 ; R2.1 v2(74.231,67.956) R7.1 80.137,67.956 80.148,67.945 84.063,67.945 R9.1 ; v1(91.694,68.326) 93.928,68.326 C5.1 ; MD1.39@55.245,52.451 MD1.39@57.15,52.451 ; MD1.39@55.245,52.451 MD1.39@55.245,54.356 ; MD1.39@55.245,54.356 MD1.39@57.15,54.356 ; MD1.39@55.245,54.356 MD1.39@55.245,56.134 ; MD1.39@55.245,56.134 MD1.39@57.15,56.134 ; MD1.39@57.15,52.451 MD1.39@58.928,52.451 ; MD1.39@57.15,52.451 MD1.39@57.15,54.356 ; MD1.39@57.15,54.356 MD1.39@58.928,54.356 ; MD1.39@57.15,54.356 MD1.39@57.15,56.134 ; MD1.39@57.15,56.134 MD1.39@58.928,56.134 ; MD1.39@58.928,52.451 MD1.39@58.928,54.356 ; MD1.39@58.928,54.356 MD1.39@58.928,56.134
  Top Layer w0.8: ST3.1 44.249,46.81 MD1.38 ; MD1.1 67.236,46.81 67.448,46.598 C4.1 69.607,46.587 C1.1 74.698,46.609 v1(76.454,46.609)
  Top Layer w1: CP1.3 CP1.2 v3(92.71,49.022) ; Q1.3 97.941,53.613 99.803,53.613 v3(99.822,53.594) ; v3(102.332,51.239) 104.515,51.239 C6.1 ; v3(116.586,46.99) 116.588,46.992 116.588,49.694 Q2.3 ; Q3.3 127.964,49.625 127.964,47.042 v3(128.016,46.99) ; Q4.3 139.477,49.823 139.496,49.803 141.297,49.803 141.532,50.038 v3(141.605,50.038)
  other v1: 52.959,71.755 54.229,73.152
  other v2: 78.232,67.945 82.169,67.945
LED_B: MD1.9 R6.2 R9.2 | length 26.5
  Top Layer w0.254: MD1.9 68.019,56.97 71.628,60.579 R6.2 84.052,66.134 R9.2
LED_G: MD1.11 R4.2 R7.2 | length 16.2
  Top Layer w0.254: MD1.11 67.13,59.51 70.485,62.865 R4.2 76.189,66.145 R7.2
LED_R: MD1.10 R5.2 R8.1 | length 21.3
  Top Layer w0.254: MD1.10 67.638,58.24 71.247,61.849 R5.2 R8.1
Magnet: MD1.12 R1.2 R2.2 | length 11
  Top Layer w0.254: MD1.12 66.749,60.78 70.104,64.135 R1.2 72.252,66.145 R2.2
NetC10_2: C10.2 F1.2 U2.12 | length 12.3
  Top Layer w0.254: C10.2 49.591,75.928 50.237,76.574 52.966,76.574 54.102,75.438 ; U2.12 54.102,75.438 ; F1.2@59.002,78.083 58.853,78.232 56.896,78.232 54.102,75.438
NetC12_2: C12.2 U2.10 U2.11 U2.20 | length 15.8
  Top Layer w0.254: U2.20 51.306,71.51 50.726,70.93 50.726,70.659 v1(50.679,70.612) 50.679,68.933 51.244,68.368 51.244,68.318 51.617,67.945 C12.2 ; U2.11 54.602,74.806 55.488,75.692 v1(55.499,75.692) 55.499,75.625 55.627,75.497 U2.10
  Bottom Layer w0.254: v1(50.679,70.612) 50.679,71.585 54.786,75.692 v1(55.499,75.692)
NetD1_1: D1.1 D1.3 J1.2 Q1.4 | length 17
  Top Layer w1: Q1.4 97.405,62.607 100.792,62.607 101.092,62.907 D1.1@101.092,67.187 ; D1.1 101.01,67.405 101.092,67.487 101.092,72.039 102.078,73.025 J1.2
NetD2_2: D2.2 J2.2 Q2.4 | length 16.5
  Top Layer w1: J2.2 113.691,72.872 113.691,67.152 114.041,66.802 D2.2 114.205,56.991 Q2.4
NetD3_2: D3.2 J3.2 Q3.4 | length 16.6
  Top Layer w1: J3.2 125.025,72.977 125.025,67.257 125.375,66.907 D3.2 125.507,56.992 Q3.4
NetD4_2: D4.2 J4.2 Q4.4 | length 16.5
  Top Layer w1: J4.2 136.347,72.999 136.347,67.279 136.697,66.929 D4.2 136.843,57.086 Q4.4
NetDS1_1: DS1.1 R11.1 | length 2.6
  Top Layer w0.254: R11.1 51.828,78.232 DS1.1@52.082,77.978
NetDS1_2: DS1.2 U2.14 | length 4.5
  Top Layer w0.254: v1(52.451,75.819) 53.102,75.168 U2.14 ; DS1.2 53.669,78.157 v1(53.669,76.978)
  Bottom Layer w0.254: v1(52.451,75.819) 53.61,76.978 v1(53.669,76.978)
NetDS2_1: DS2.1 R12.1 | length 3.4
  Top Layer w0.254: DS2.1 63.996,67.691 R12.1
NetDS2_2: DS2.2 U2.7 | length 6.9
  Top Layer w0.254: U2.7 57.022,72.01 60.071,68.961 DS2.2
NetF1_1: F1.1 J5.1 | length 11
  Top Layer w0.254: F1.1 61.669,78.158 v1(62.865,76.962) ; v1(64.942,72.472) J5.1
  Bottom Layer w0.254: v1(62.865,76.962) 62.865,74.549 v1(64.942,72.472)
NetJ5_2: J5.2 R10.1 | length 5.5
  Top Layer w0.254: R10.1@62.103,73.025 62.2,73.122 J5.2
NetJ5_3: J5.3 R13.1 | length 6.2
  Top Layer w0.254: R13.1 62.037,75.184 63.449,73.772 J5.3
NetQ1_1: Q1.1 R1.1 | length 27
  Top Layer w0.254: R1.1 v1(75.438,64.135) ; Q1.1 93.345,53.637 93.345,56.367 93.604,56.626 v1(93.604,57.356)
  Bottom Layer w0.254: v1(75.438,64.135) 88.265,64.135 93.604,58.796 v1(93.604,57.356)
NetQ2_1: Q2.1 R4.1 | length 39.7
  Top Layer w0.254: R4.1 v1(79.248,62.865) ; v1(110.363,50.8) 111.337,50.8 112.01,50.127 Q2.1
  Bottom Layer w0.254: v1(79.248,62.865) 86.995,62.865 93.98,55.88 99.822,55.88 104.902,50.8 v1(110.363,50.8)
NetQ3_1: Q3.1 R5.1 | length 46.4
  Top Layer w0.254: R5.1 v1(83.312,61.849) ; v1(120.904,50.038) 122.971,50.038 Q3.1
  Bottom Layer w0.254: v1(83.312,61.849) 86.233,61.849 98.044,50.038 v1(120.904,50.038)
NetQ4_1: Q4.1 R6.1 | length 54
  Top Layer w0.254: R6.1 85.902,60.579 86.741,59.74 v1(86.741,59.69) ; v1(132.334,49.022) 133.943,49.022 134.616,49.695 Q4.1
  Bottom Layer w0.254: v1(86.741,59.69) 97.409,49.022 v1(132.334,49.022)
NetQ5_2: Q5.2 R15.1 | length 7.2
  Top Layer w0.254: R15.1 44.726,75.946 v1(46.101,75.946) ; Q5.2 47.879,72.136 v1(48.006,72.263)
  Bottom Layer w0.254: v1(46.101,75.946) 48.006,74.041 v1(48.006,72.263)
NetQ5_5: Q5.5 R16.1 | length 4.7
  Top Layer w0.254: R16.1 40.767,71.181 41.722,72.136 Q5.5
NetR10_2: R10.2 U2.9 | length 4.7
  Top Layer w0.254: U2.9 60.288,73.01 R10.2@60.303,73.025
NetR13_2: R13.2 U2.8 | length 6.8
  Top Layer w0.254: U2.8 57.979,72.51 58.222,72.267 v1(58.289,72.267) ; v1(58.289,73.91) 59.19,74.811 59.814,74.811 R13.2
  Bottom Layer w0.254: v1(58.289,72.267) v1(58.289,73.91)
RTS: Q5.1 R16.2 U2.19 | length 12.9
  Top Layer w0.254: R16.2 42.534,69.331 v1(42.545,69.342) ; v1(46.863,69.85) 46.879,69.866 46.879,71.463 46.894,71.478 Q5.1 48.94,71.486 49.464,72.01 U2.19
  Bottom Layer w0.254: v1(42.545,69.342) 46.355,69.342 v1(46.863,69.85)
RXD: MD1.34 U2.17 | length 27
  Top Layer w0.254: v1(45.339,68.453) 45.339,52.959 46.402,51.896 47.628,51.896 MD1.34 ; v1(50.124,73.01) U2.17
  Bottom Layer w0.254: v1(45.339,68.453) 46.736,68.453 50.124,71.841 v1(50.124,73.01)
TXD: MD1.35 U2.1 | length 23.7
  Top Layer w0.254: MD1.35 48.969,50.62 49.276,50.927 49.276,65.786 49.878,66.388 51.656,66.388 52.602,67.334 U2.1
pads on no net: CP1.0 J5.4 J5.6 J5.7 J5.8 MD1.4 MD1.5 MD1.6 MD1.7 MD1.8 MD1.13 MD1.14 MD1.16 MD1.17 MD1.18 MD1.19 MD1.20 MD1.21 MD1.22 MD1.23 MD1.24 MD1.26 MD1.27 MD1.28 MD1.29 MD1.30 MD1.31 MD1.32 MD1.33 MD1.36 MD1.37 U2.2 U2.4 U2.5 U2.6 U2.15 U2.16

## Polygon pours and split planes (outlines as drawn)
+12 on Top Layer "NONET_L-01_P-001" (solid, pour order 0): 37.592,79.375 151.003,79.375 151.003,45.593 37.592,45.593
GND on Bottom Layer "NONET_L-01_P-001" (solid, pour order 1): 37.592,45.593 37.592,79.375 151.003,79.375 151.003,45.593

## Silkscreen, mask and mechanical layers (free items; w line width, h text height)
Top Overlay:
  text "Tidsram" at 75.565,74.453 h3
Bottom Overlay:
  lines w0.254: 100.584,76.454 103.632,76.454 ; 111.76,76.454 114.808,76.454 ; 123.19,76.454 126.238,76.454 ; 134.366,76.454 137.414,76.454
Board:
  lines w0.1: 38.992,45.59 37.592,45.59 ; 37.592,45.59 151.003,45.59 151.003,79.375 37.592,79.375 37.592,45.59